# Altium PCB PCB1.PcbDoc
Units mm, origin at the board's own origin, x right, y up, seen from the top; angles counter-clockwise.
Board outline 110 x 60 mm, 2 copper layers (Top Layer, Bottom Layer); 19 components, 18 nets, 133 pads, 0 vias.
Unrouted connection lines stored in the file: 3.
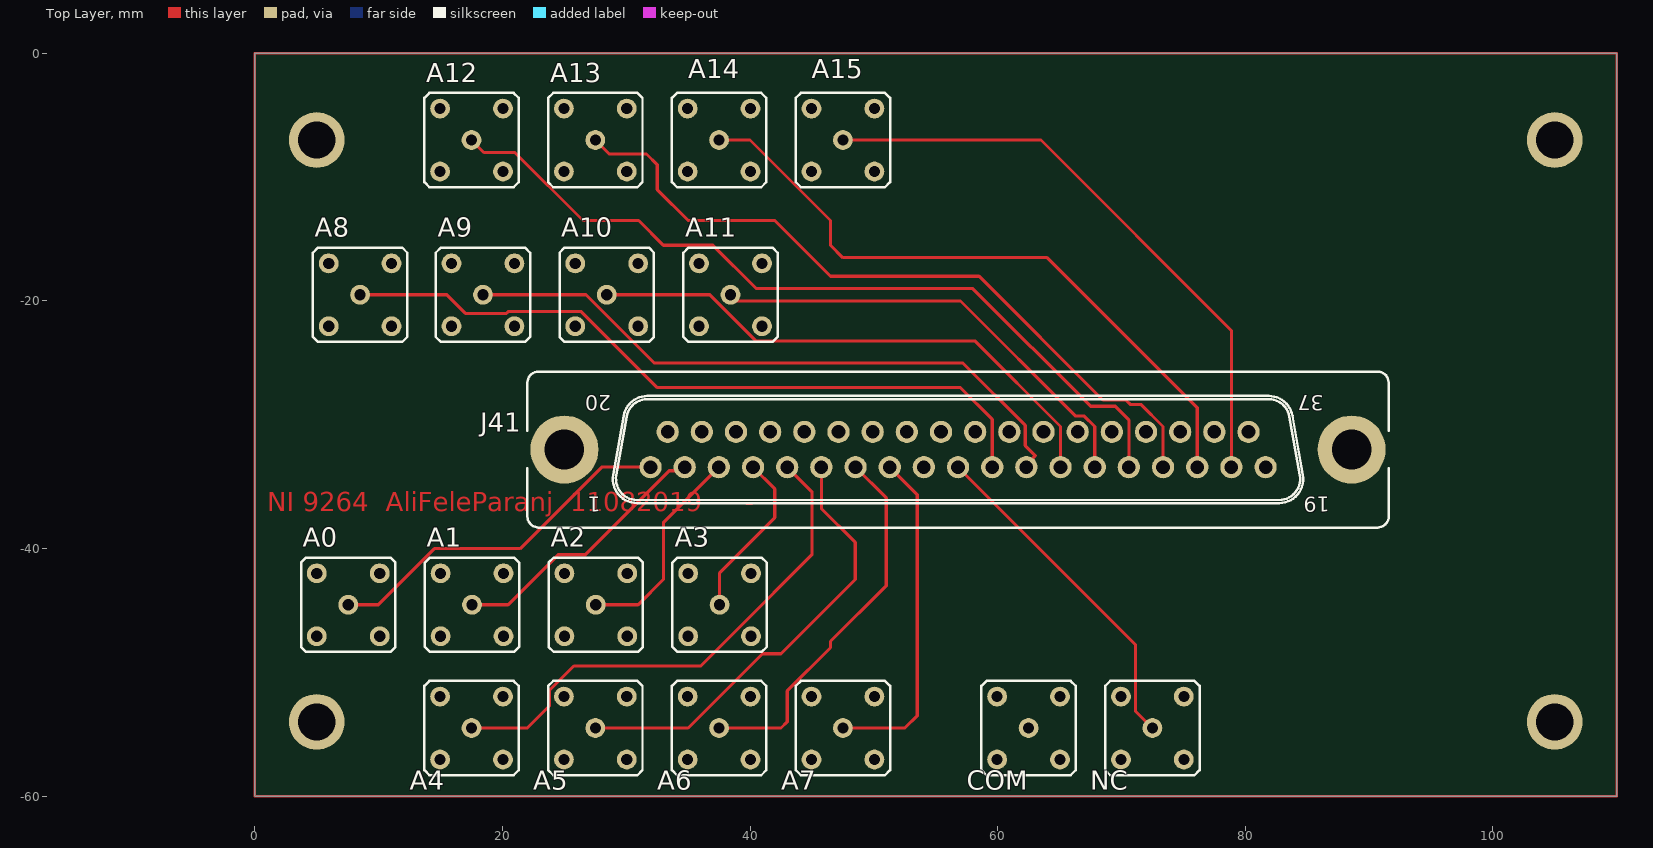
[diagram p0: Top Layer view]
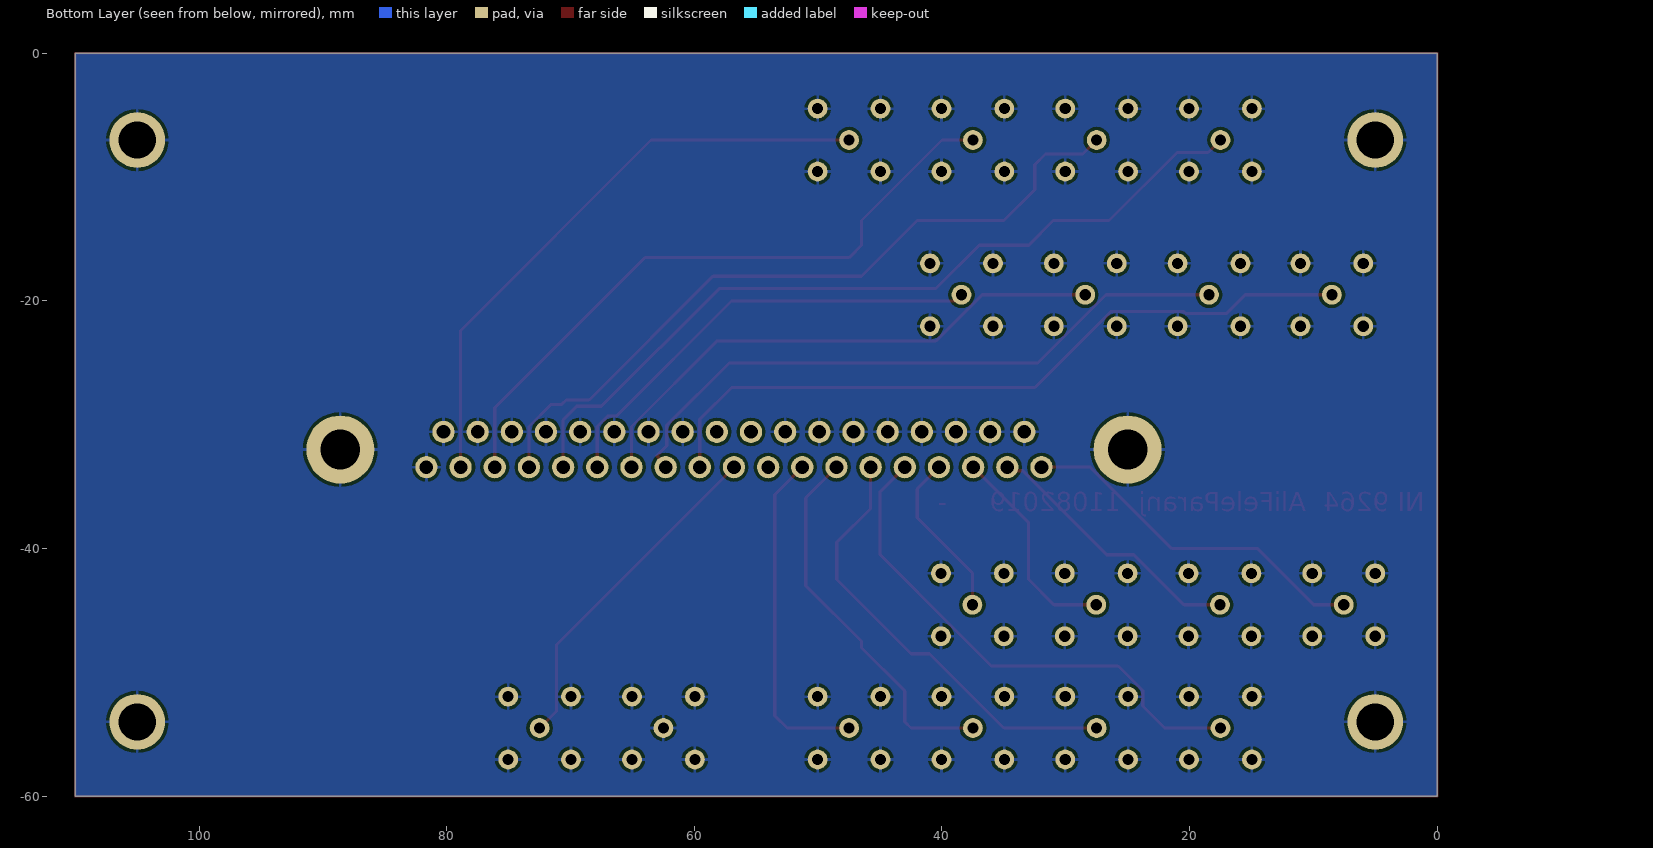
[diagram p1: Bottom Layer view, seen from below]
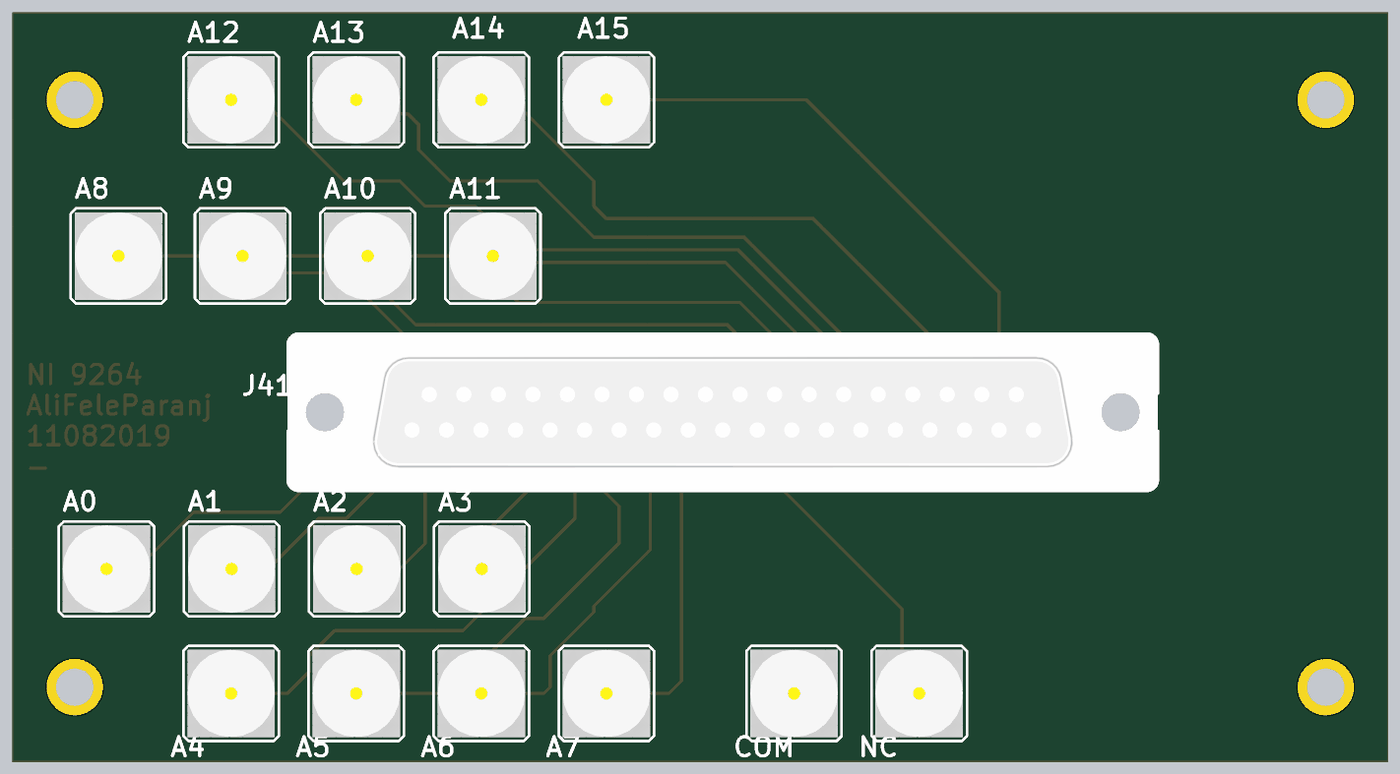
[diagram p2: 3D render of the assembled board from above, using the file's embedded part models]

## Layer stack, top to bottom
Top Solder: solder mask 0.0102, Solder Resist, Dk 3.5
Top Layer: signal copper 0.0356
Dielectric 1: dielectric 0.32, FR-4, Dk 4.8
Bottom Layer: signal copper 0.0356
Bottom Solder: solder mask 0.0102, Solder Resist, Dk 3.5

## Board outline
0,-60 110,-60 110,-44 110,-14 110,0 0,0

## Design rules (kind name [scope] priority, off if disabled: settings)
Clearance [All] p1: gap=0.254 ignorepadtopadclearanceinfootprint=FALSE except(0: Arc-Hole Track-Hole SMDPad-Hole THPad-Hole Via-Hole Fill-Hole Poly-Hole Region-Hole Text-Hole)
PolygonConnect [All] p1: connectstyle=Relief reliefconductorwidth=0.254 reliefentries=4 polygonreliefangle="90 Angle" airgapwidth=0.254
RoutingLayers "Schematic Routing Layers" [InNet('GND')] p1: top layer_v5=FALSE bottom layer_v5=TRUE
RoutingLayers [All] p2: top layer_v5=TRUE bottom layer_v5=TRUE
RoutingVias [All] p1: holewidth=0.711 width=1.27 viastyle="Through Hole" minholewidth=0.711 minwidth=1.27 maxholewidth=0.711 maxwidth=1.27
SolderMaskExpansion [All] p1: expansion=0.102
Width [All] p1: maxlimit=0.254 minlimit=0.254 preferedwidth=0.254
29 further rules are at their usual default settings.

## Components (designator, comment, footprint, x,y, rotation, side; value= is the part's Value field where it differs from the comment)
A0 "LEMO 00" LEMO_EPA.00.250.NTN 7.54,-44.54 r0 top
A1 "LEMO 00" LEMO_EPA.00.250.NTN 17.54,-44.54 r0 top
A2 "LEMO 00" LEMO_EPA.00.250.NTN 27.54,-44.54 r0 top
A3 "LEMO 00" LEMO_EPA.00.250.NTN 37.54,-44.54 r0 top
A4 "LEMO 00" LEMO_EPA.00.250.NTN 17.5,-54.5 r0 top
A5 "LEMO 00" LEMO_EPA.00.250.NTN 27.5,-54.5 r0 top
A6 "LEMO 00" LEMO_EPA.00.250.NTN 37.5,-54.5 r0 top
A7 "LEMO 00" LEMO_EPA.00.250.NTN 47.5,-54.5 r0 top
A8 "LEMO 00" LEMO_EPA.00.250.NTN 8.5,-19.5 r0 top
A9 "LEMO 00" LEMO_EPA.00.250.NTN 18.42,-19.5 r0 top
A10 "LEMO 00" LEMO_EPA.00.250.NTN 28.42,-19.5 r0 top
A11 "LEMO 00" LEMO_EPA.00.250.NTN 38.42,-19.5 r0 top
A12 "LEMO 00" LEMO_EPA.00.250.NTN 17.5,-7 r0 top
A13 "LEMO 00" LEMO_EPA.00.250.NTN 27.5,-7 r0 top
A14 "LEMO 00" LEMO_EPA.00.250.NTN 37.5,-7 r0 top
A15 "LEMO 00" LEMO_EPA.00.250.NTN 47.5,-7 r0 top
COM "LEMO 00" LEMO_EPA.00.250.NTN 62.5,-54.5 r0 top
J41 "D-SUB37F" NORCOMP_172-037-242R011 56.801,-32 r180 top
NC "LEMO 00" LEMO_EPA.00.250.NTN 72.5,-54.5 r0 top

## Footprints (in the part's own frame and the unit in brackets; to place one, negate y for a bottom-side part, rotate by r counter-clockwise, add the part's x,y. Pads: shape width x height; smd on the part's side, far side on the other; paste and mask are expansions set on the pad)
LEMO_EPA.00.250.NTN [mm] "50 Ohm size 00 Coaxial Straight socket"
  round 1.6 hole 0.9: 1(0,0) 2(-2.54,-2.54) 2(-2.54,2.54) 2(2.54,-2.54) 2(2.54,2.54)
  silkscreen extent -3.81,-3.81 3.81,3.81, body extent -3.5,-3.5 3.5,3.5, height 14
NORCOMP_172-037-242R011 [mm] "Straight Wire Wrap D-Sub 37 Contacts Female Connector"
  round 1.8 hole 1.1: 1(24.842,1.422) 2(22.082,1.422) 3(19.322,1.422) 4(16.561,1.422) 5(13.801,1.422) 6(11.041,1.422) 7(8.281,1.422) 8(5.52,1.422) 9(2.76,1.422) 10(0,1.422) 11(-2.76,1.422) 12(-5.52,1.422) 13(-8.281,1.422) 14(-11.041,1.422) 15(-13.801,1.422) 16(-16.561,1.422) 17(-19.322,1.422) 18(-22.082,1.422) 19(-24.842,1.422) 20(23.458,-1.422) 21(20.697,-1.422) 22(17.937,-1.422) 23(15.177,-1.422) 24(12.417,-1.422) 25(9.657,-1.422) 26(6.896,-1.422) 27(4.136,-1.422) 28(1.376,-1.422) 29(-1.384,-1.422) 30(-4.145,-1.422) 31(-6.905,-1.422) 32(-9.665,-1.422) 33(-12.425,-1.422) 34(-15.185,-1.422) 35(-17.946,-1.422) 36(-20.706,-1.422) 37(-23.466,-1.422)
  round 5.5 hole 3.2: 38(-31.8,0) 39(31.801,0)
  silkscreen extent -34.79,-6.3 34.79,6.3, body extent -34.78,-6.3 34.79,6.3, height 11.93

## Part data
A0 A1 A2 A3 A4 A5 A6 A7 A8 A9 A10 A11 A12 A13 A14 A15 COM NC: library part LEMO_EPA.00.250.NTN, Manufacturer=LEMO, Manufacturer Part Number=EPA.00.250.NTN, Author="CERN DEM JLC", ComponentHeight=14mm, Component Type=Standard, CreateDate=22/04/2008, Family="LEMO 00", HelpURL=\\cern.ch\dfs\Applications\Altium\Datasheets\LEMO_EPA.00.250.NTN.pdf, LatestRevisionDate=22/04/2008, Mounted=Yes, Part Description="Size 00, 50 Ohms Coaxial Straight socket", Part Number=LEMO_EPA.00.250.NTN, Pin Count=2, PressFit=No, SCEM=09.46.11.184.2, Sense=No, SMD=No, Socket=No, Status=None
J41: library part NORCOMP_172-037-242R011, "Connector D-sub 37 Female", Manufacturer=NORCOMP, Manufacturer Part Number=172-037-242R011, Author="CERN DEM MR", ComponentHeight=12.08mm, Component Type=Standard, CreateDate=24/03/2016, Family=D-SUB37F, HelpURL=\\cern.ch\dfs\Applications\Altium\Datasheets\NORCOMP_172-037-242R011.pdf, LatestRevisionDate=24/03/2016, Mounted=Yes, Part Description="Straight Wire Wrap D-Sub 37 Contacts Female Connector With 0.065\"Clinch Nut (Board Side)", Part Number=NORCOMP_172-037-242R011, Pin Count=39, PressFit=No, Sense=No, SMD=No, Socket=No, Status=None

## Free pads (board coordinates)
  round 4.5 hole 3: 12(5,-54) 12(5,-7) 12(105,-54) 12(105,-7)

## Nets (pads, with @x,y where several pads share a name; then routed paths per layer and width w, separated by ;. In a path a pad name is that pad's centre, name@x,y a point inside that pad or via, vN(x,y) a via of type N, cw(c..) or ccw(c..) an arc to the next point about the centre after c; other vN are vias at no path point)
A0: A0.1 J41.1 | length 29
  Top Layer w0.254: A0.1 9.96,-44.54 14.5,-40 21.428,-40 28.005,-33.422 J41.1
A1: A1.1 J41.2 | length 21.8
  Top Layer w0.254: A1.1 20.46,-44.54 24.5,-40.5 26.693,-40.5 33.475,-33.718 34.424,-33.718 J41.2
A2: A2.1 J41.3 | length 17.2
  Top Layer w0.254: A2.1 30.96,-44.54 33,-42.5 33,-37.902 J41.3
A3: A3.1 J41.4 | length 13.7
  Top Layer w0.254: A3.1 37.54,-41.96 42,-37.5 42,-35.183 J41.4
A4: A4.1 J41.5 | length 41.9
  Top Layer w0.254: A4.1 22,-54.5 23.779,-52.721 23.779,-51.471 25.764,-49.485 36.015,-49.485 38.795,-46.705 38.795,-46.694 44.99,-40.5 44.99,-35.412 J41.5
A5: A5.1 J41.6 | length 36.2
  Top Layer w0.254: A5.1 35,-54.5 41,-48.5 42.5,-48.5 48.5,-42.5 48.5,-39.5 45.76,-36.76 J41.6
A6: A6.1 J41.7 | length 30.6
  Top Layer w0.254: A6.1 42.5,-54.5 43,-54 43,-51.5 46.5,-48 46.5,-47.5 51,-43 51,-35.902 J41.7
A7: A7.1 J41.8 | length 27.4
  Top Layer w0.254: A7.1 52.5,-54.5 53.5,-53.5 53.5,-35.642 J41.8
A8: A8.1 J41.11 | length 59.2
  Top Layer w0.254: A8.1 15.5,-19.5 17,-21 20.33,-21 20.471,-20.859 26.369,-20.859 32.51,-27 57,-27 59.561,-29.561 J41.11
A9: A9.1 J41.12 | length 52.2
  Top Layer w0.254: A9.1 26.75,-19.5 32.258,-25.008 57.188,-25.008 62.227,-30.047 62.227,-31.681 63.039,-32.494 62.322,-33.212 J41.12
A10: A10.1 J41.13 | length 44.4
  Top Layer w0.254: A10.1 36.75,-19.5 40.471,-23.221 58.161,-23.221 65.082,-30.142 J41.13
A11: A11.1 J41.14 | length 37.1
  Top Layer w0.254: A11.1 38.92,-20 57,-20 66.297,-29.297 66.997,-29.297 67.842,-30.142 J41.14
A12: A12.1 J41.15 | length 66.3
  Top Layer w0.254: A12.1 18.5,-8 21,-8 26.5,-13.5 31,-13.5 33,-15.5 37,-15.5 40.492,-18.992 57.71,-18.992 57.718,-19 58,-19 67.508,-28.508 69.508,-28.508 70.602,-29.602 J41.15
A13: A13.1 J41.16 | length 59.9
  Top Layer w0.254: A13.1 28.629,-8.129 31.629,-8.129 32.5,-9 32.5,-11 35,-13.5 42,-13.5 46.5,-18 58.5,-18 68.5,-28 70.351,-28 70.706,-28.354 71.575,-28.354 73.363,-30.142 J41.16
A14: A14.1 J41.17 | length 54.1
  Top Layer w0.254: A14.1@37,-7 A14.1 40,-7 46.5,-13.5 46.5,-15.5 47.5,-16.5 64,-16.5 76.123,-28.623 J41.17
A15: A15.1 J41.18 | length 48.8
  Top Layer w0.254: A15.1 63.5,-7 78.883,-22.383 J41.18
GND: A0.2 A1.2 A2.2 A3.2 A4.2 A5.2 A6.2 A7.2 A8.2 A9.2 A10.2 A11.2 A12.2 A13.2 A14.2 A15.2 COM.1 COM.2 J41.19 J41.20 J41.21 J41.22 J41.23 J41.24 J41.25 J41.26 J41.27 J41.30 J41.31 J41.32 J41.33 J41.34 J41.35 J41.36 J41.37 J41.38 J41.39 NC.2 pad.12
NC: J41.9 J41.10 J41.28 J41.29 NC.1 | length 27.6
  Top Layer w0.254: J41.10 71.141,-47.762 71.141,-53.141 NC.1
copper on no net: | length 340
  Top Layer w0.2: 0,-60 0,0 110,0 110,-14 110,-44 110,-60 0,-60

## Polygon pours and split planes (outlines as drawn)
GND on Bottom Layer "gnd" (solid, remove dead copper, pour order 46): 0,0 110,0 110,-60 0,-60
GND on Bottom Layer "Bottom Layer-GND 1" (solid, pour order 32): -10,-19
GND on Bottom Layer "Bottom Layer-GND 2" (solid, pour order 18): -3.25,-1.25

## Other copper
Top Layer:
  text "NI 9264  AliFeleParanj  11082019     -" at 1,-37 h1.52
Bottom Layer:
  region net GND: -14.5,-58.625

## Text inside footprints (layer, text, board x,y; h text height)
J41: Top Overlay "20" at 28.771,-27.6 h1.2 r180; Top Overlay "19" at 86.832,-35.8 h1.2 r180; Top Overlay "37" at 86.332,-27.6 h1.2 r180; Top Overlay "1" at 27.921,-35.8 h1.2 r180; Mechanical 14 "1" at 27.921,-35.8 h1.2 r180; Mechanical 14 "37" at 86.332,-27.6 h1.2 r180; Mechanical 14 "19" at 86.832,-35.8 h1.2 r180; Mechanical 14 "20" at 28.771,-27.6 h1.2 r180